# Altium PCB RFTP2917.PcbDoc
Units mm, origin at the board's own origin, x right, y up, seen from the top; angles counter-clockwise.
Board outline 60 x 25 mm, 2 copper layers (Top Layer, Bottom Layer); 3 components, 5 nets, 12 pads, 0 vias.
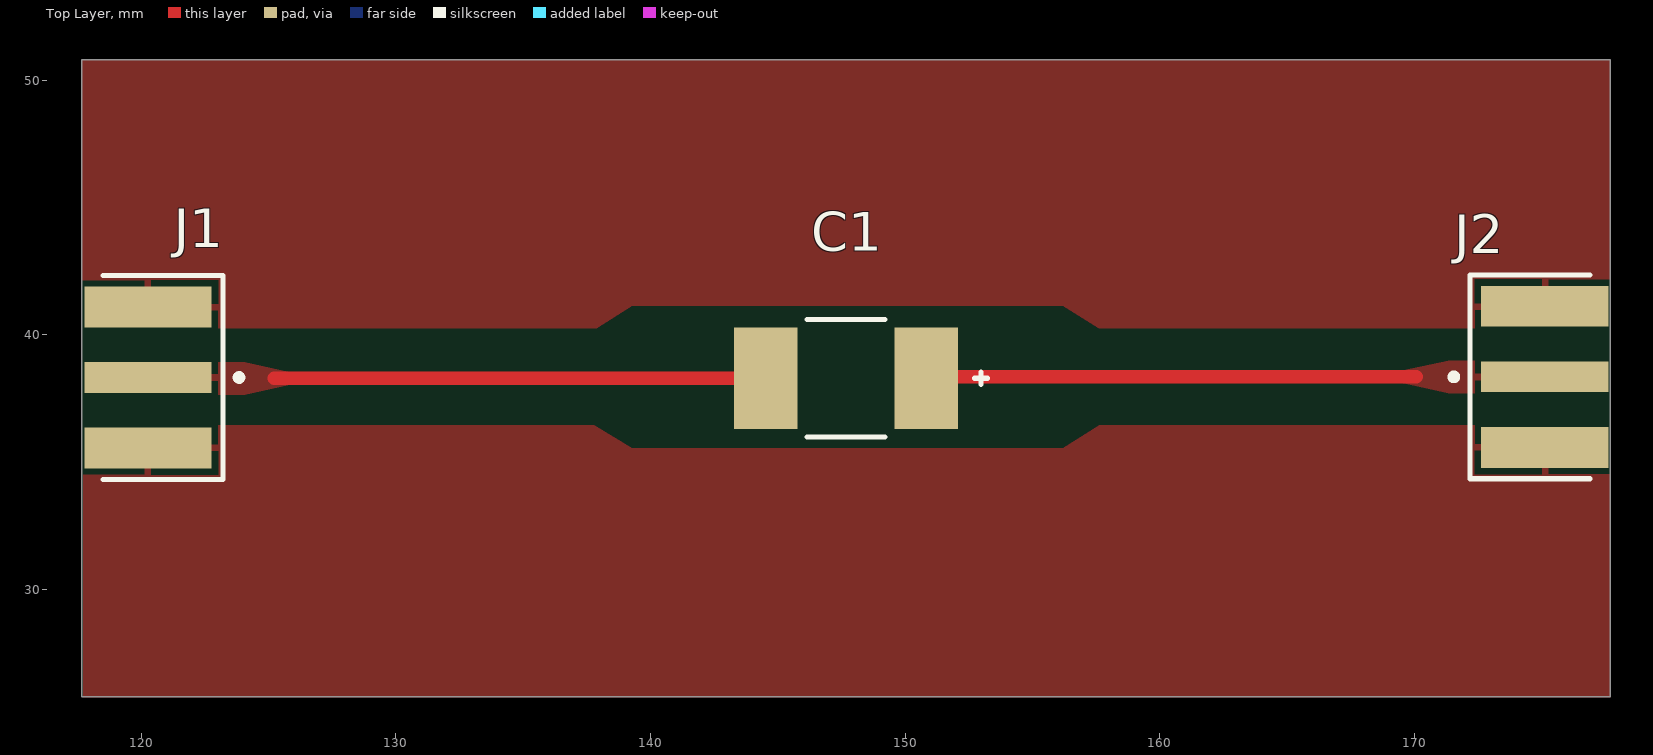
[diagram p0: Top Layer view]
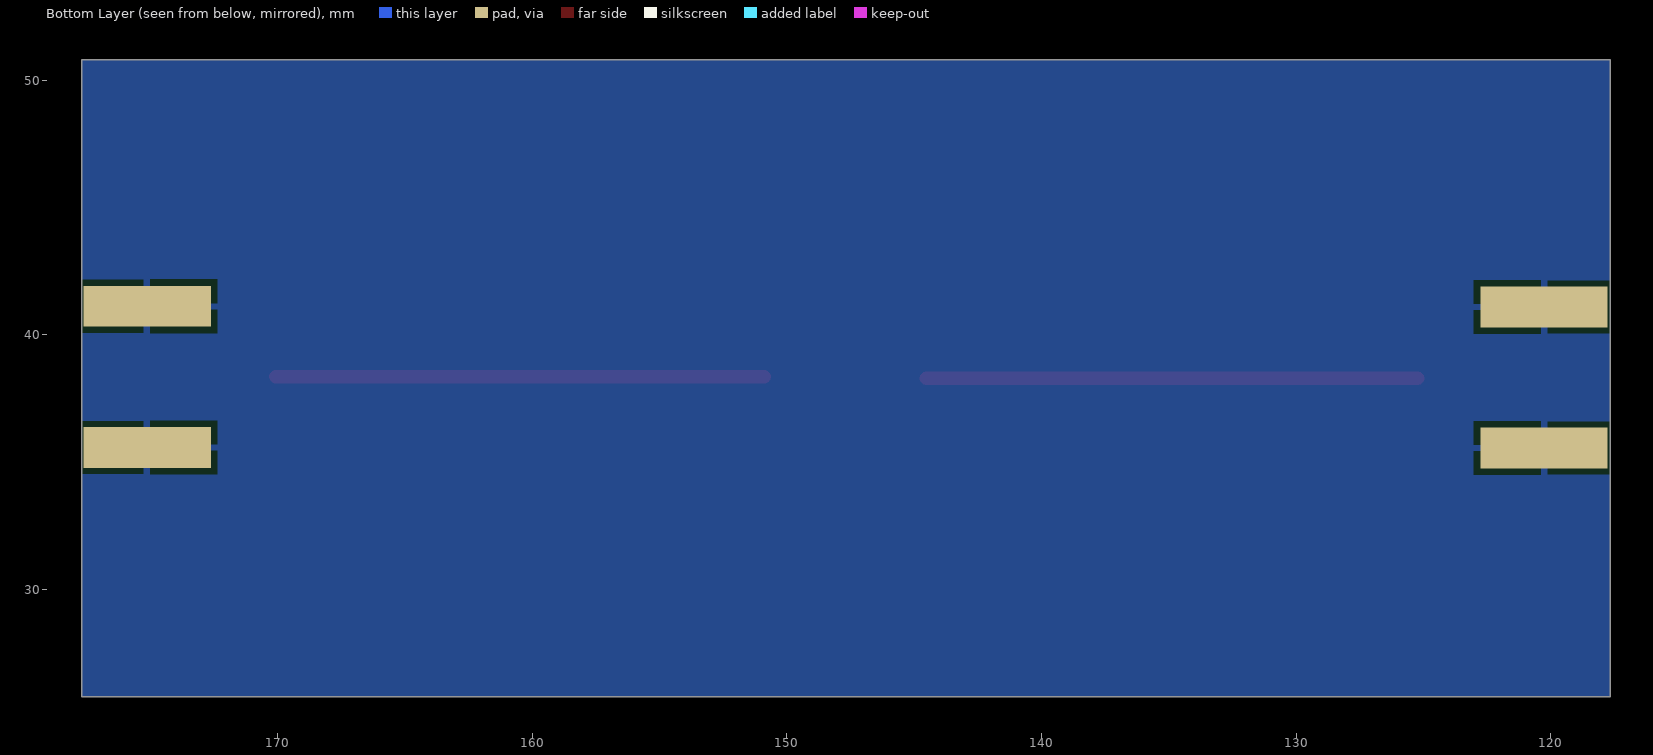
[diagram p1: Bottom Layer view, seen from below]
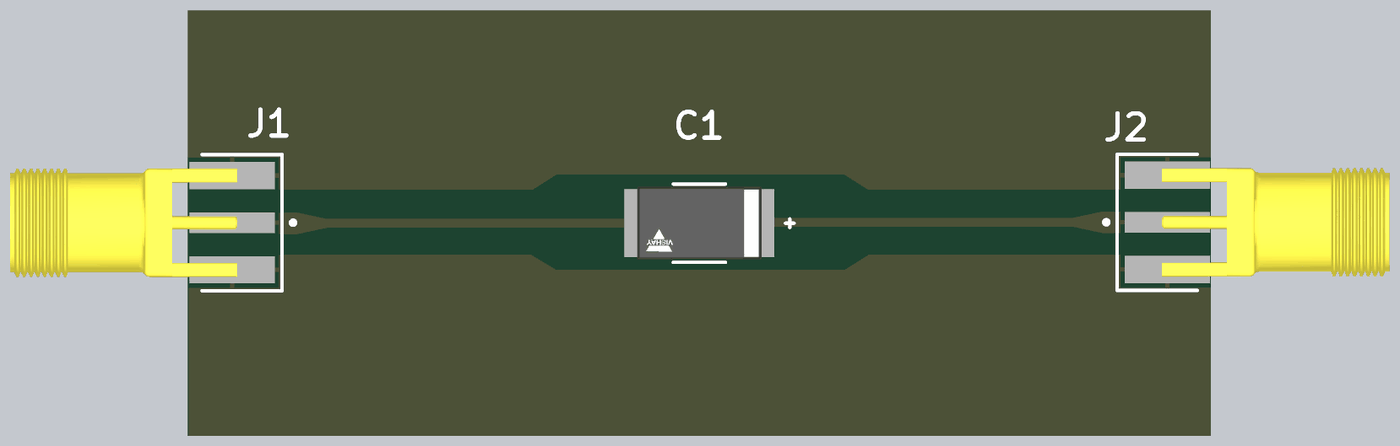
[diagram p2: 3D render of the assembled board from above, using the file's embedded part models]

## Layer stack, top to bottom
Top Solder: solder mask 0.0102, Solder Resist, Dk 3.5
Top Layer: signal copper 0.0356
Dielectric 1: dielectric 0.32, FR-4, Dk 4.8
Bottom Layer: signal copper 0.0356
Bottom Solder: solder mask 0.0102, Solder Resist, Dk 3.5

## Board outline
117.673,25.8 117.673,50.8 177.673,50.8 177.673,25.8

## Design rules (kind name [scope] priority, off if disabled: settings)
Clearance [All] p1: gap=0.254 ignorepadtopadclearanceinfootprint=FALSE
PolygonConnect [All] p1: connectstyle=Relief reliefconductorwidth=0.254 reliefentries=4 polygonreliefangle="90 Angle" airgapwidth=0.254
RoutingVias [All] p1: holewidth=0.711 width=1.27 viastyle="Through Hole" minholewidth=0.711 minwidth=1.27 maxholewidth=0.711 maxwidth=1.27
SolderMaskExpansion [All] p1: expansion=0.102 istentingtop=FALSE
Width [All] p1: maxlimit=5 minlimit=0.254 preferedwidth=0.254 bottomlayer_maxwidth=0.254 minimp=50.000000 maximp=50.000000 favimp=50.000000
30 further rules are at their usual default settings.

## Components (designator, comment, footprint, x,y, rotation, side; value= is the part's Value field where it differs from the comment)
C1 "TR3D107K020C0080" FP-TR3D-MFG 147.673,38.3 r0 top
J1 "CON-SMA-EDGE-S" FP-CON-SMA-EDGE-S-MFG 113.009,38.33 r90 top
J2 "CON-SMA-EDGE-S" FP-CON-SMA-EDGE-S-MFG 182.372,38.354 r270 top

## Footprints (in the part's own frame and the unit in brackets; to place one, negate y for a bottom-side part, rotate by r counter-clockwise, add the part's x,y. Pads: shape width x height; smd on the part's side, far side on the other; paste and mask are expansions set on the pad)
FP-CON-SMA-EDGE-S-MFG [mm]
  rect 1.2x5 smd paste+0 mask+0: 1(0,-7.26)
  rect 1.6x5 smd paste+0 mask+0: 2(-2.77,-7.26) 3(2.77,-7.26)
  rect 1.6x5 smd far side paste+0 mask+0: 4(-2.77,-7.26) 5(2.77,-7.26)
  silkscreen extent -4,-10.96 4,-5.5, body extent -3.67,-9.86 3.67,4.86, height 0.25
FP-TR3D-MFG [mm]
  rect 2.5x4 smd paste+0 mask+0: 1(-3.15,0) 2(3.15,0)
  silkscreen extent -1.53,-2.3 5.55,2.3, body extent -4.5,-2.4 4.5,2.4, height 0.25

## Part data
C1: library part CMP-00030-44433242-1, "TR3D107K020C0080 Surface Mount Tantalum Capacitor, 100 uF, 20 V, ± 10%, -55 °C, 125 °C, 2917 [7343-31 Metric]", Capacitance=100µF, Case Code (Imperial)=2917, Case Code (Metric)=7343, ESR (Equivalent Series Resistance)=80mΩ, Leakage Current=20µA, Max Operating Temperature=125°C, Min Operating Temperature=-55°C, Ripple Current=1.37A, Tolerance=10%, Voltage Rating=20V, Case/Package=2917, Depth=4.3mm, Dissipation Factor=8%, Features="General Purpose", Height=3.1mm, Height - Seated (Max)=3.0988mm, Lead Free="Lead Free", Length=7.3mm, Mount="Surface Mount", NexarPartId=44433242, Packaging="Tape and Reel", Polarity=Polar, Radiation Hardening=No, REACH SVHC=Unknown, RoHS=Compliant, Schedule B="8532210050, 8532210050", Termination=SMD/SMT, Voltage Rating (DC)=20V, Width=4.3mm
J1 J2: library part CMP-204357-000001-1, "CONN SMA JACK STR EDGE MNT", Frequency=18GHz, Manufacturer="RF Solutions Ltd.", Package=CONN_JACK, Automotive=No, Category=Conn, ComponentLink2Description=Datasheet, ComponentLink2URL=https://www.rfsolutions.co.uk/downloads/1498648656DS-CON-EDGE-SMA-4.pdf, Conn Orientation="Right Angle", Contact Material=Gold, Device Class L1=Connectors, Device Class L2="RF / Coaxial Connectors", Device Class L3=unset, Digikey Description="CONN SMA JACK STR EDGE MNT", Footprint Url=https://forum.upverter.com/uploads/default/original/3X/b/e/be75b907af57498775929d6d9099689c472e0307.pdf, Height=6.35mm, Impedance=50Ω, Is Female=yes, Lead Free=Yes, Manufacturer Part Number=CON-SMA-EDGE-S, Number of Contacts=1, Octopart=https://octopart.com/con-sma-edge-s-rf+solutions-70967450, RoHS=TRUE, Shielding=true

## Nets (pads, with @x,y where several pads share a name; then routed paths per layer and width w, separated by ;. In a path a pad name is that pad's centre, name@x,y a point inside that pad or via, vN(x,y) a via of type N, cw(c..) or ccw(c..) an arc to the next point about the centre after c; other vN are vias at no path point)
GND: J1.4 J1.5 J2.4 J2.5
GND1: J1.3 J2.2
GND2: J1.2 J2.3
NetC1_1: C1.1 J1.1 | length 19.3
  Top Layer w0.535: 125.222,38.3 C1.1
NetC1_2: C1.2 J2.1 | length 19.3
  Top Layer w0.381: C1.2 C1.2@150.877,38.354
  Top Layer w0.535: C1.2@150.877,38.354 170.053,38.354

## Polygon pours and split planes (outlines as drawn)
NetC1_1 on Top Layer "NONET_L02_P-001" (solid, pour order 16): 118.745,37.655 118.745,38.925 124.079,38.925 125.857,38.544 125.857,38.036 124.079,37.655
NetC1_2 on Top Layer "NONET_L02_P-001" (solid, pour order 13): 176.657,38.989 176.657,37.719 171.323,37.719 169.545,38.1 169.545,38.608 171.323,38.989
GND2 on Top Layer "NONET_L02_P-001" (solid, pour order 1): 156.192,35.56 157.607,36.449 172.466,36.449 177.673,36.449 177.673,25.781 117.729,25.781 117.729,35.56 117.602,36.449 137.795,36.449 139.283,35.56
GND1 on Top Layer "NONET_L02_P-001" (solid, pour order 2): 156.192,41.148 157.589,40.259 177.673,40.259 177.673,50.8 117.673,50.8 117.673,41.148 117.729,40.259 137.886,40.259 139.283,41.148
GND on Bottom Layer "NONET_L02_P-001" (solid, pour order 0): 117.692,50.8 177.673,50.8 177.673,25.8 117.692,25.8